# EAGLE board Accumulator Control Unit rev4 - blank (EAGLE 9.6.2)

Size 275.26 x 88.24 mm. Coordinates in mm from the lower left corner, seen from the top.
Outline: 48.72,73.39 241.02,73.39 247.82,66.59 272.92,66.59 275.02,64.49 275.02,5.39 arc-195 267.32,3.69 261.02,9.99 195.92,9.99 189.92,3.99 145.52,3.99 144.52,2.99 arc-150 136.72,2.99 135.72,3.99 34.02,3.99 33.02,2.99 arc-150 25.32,2.99 24.32,3.99 15.72,3.99 13.62,6.09 13.62,33.59 46.62,66.59 46.62,71.29 48.72,73.39
Copper layers (1*16): Top 0.035mm / dielectric 1.5mm / Bottom 0.035mm
Design rules "default": minimum track width 6mil, minimum drill 0.35mm, track to track 6mil, track to pad 6mil, pad to pad 6mil, via to via 6mil, smd to smd 6mil, copper to edge 40mil, drill to drill 6mil, minimum pad ring 10mil, minimum via ring 8mil, stop-mask expansion 4mil, vias tented up to drill 0mil, thermal gap 10mil

## Footprints (pad centres in the part's own frame; a part is rotated, then mirrored left to right if it is on the bottom)
0603-LED = smd 0.8 x 0.8: 1 -0.825,0; 2 0.825,0
OKI-78SR = drill 0.991: 1 -2.54,0; 2 0,0; 3 2.54,0
TEENSY_SHORT = drill 1.016: 3.3V 0,5.08; AGND/GND 0,2.54; D0 15.24,2.54; D1 15.24,5.08; D2 15.24,7.62; D3 15.24,10.16; D4 15.24,12.7; D5 15.24,15.24; D6 15.24,17.78; D7 15.24,20.32; D8 15.24,22.86; D9 15.24,25.4; D10 15.24,27.94; D11 15.24,30.48; D12 15.24,33.02; D13 0,33.02; D14 0,30.48; D15 0,27.94; D16 0,25.4; D17 0,22.86; D18 0,20.32; D19 0,17.78; D20 0,15.24; D21 0,12.7; D22 0,10.16; D23 0,7.62; GND 15.24,0; VIN 0,0
MICRO_MINIATURE = smd 3.429 x 1.778: 1 0,0
0603-CAP = smd 0.9 x 0.9: 1 -0.75,0; 2 0.75,0
0805-CAP = smd 0.95 x 1.4: 1 -0.925,0; 2 0.925,0
DO-214AA = smd 1.27 x 2.1: 1 -1.98,0; 2 1.98,0
SOT-23 = smd 0.711 x 0.889: 1 -0.94,-1.003; 2 0.94,-1.003; 3 0,1.003
0603-FUSE = smd 0.914 x 1.27: 1 -0.838,0; 2 0.838,0
MOLEX_MICROFIT_PTH_VERTICAL_02_SINGLE = drill 1.067: 1 1.499,0; 2 -1.499,0 | hole 1.321: 4.496,-1.956; -4.496,-1.956
MOLEX_MICROFIT_PTH_VERTICAL_08_DUAL = drill 1.067: 1 4.496,-2.997; 2 1.499,-2.997; 3 -1.499,-2.997; 4 -4.496,-2.997; 5 4.496,0; 6 1.499,0; 7 -1.499,0; 8 -4.496,0 | hole 1.067: 7.493,0.94; -7.493,0.94
MOLEX_MICROFIT_PTH_VERTICAL_12_DUAL = drill 1.067: 1 7.493,-2.997; 2 4.496,-2.997; 3 1.499,-2.997; 4 -1.499,-2.997; 5 -4.496,-2.997; 6 -7.493,-2.997; 7 7.493,0; 8 4.496,0; 9 1.499,0; 10 -1.499,0; 11 -4.496,0; 12 -7.493,0 | hole 1.067: 10.49,0.94; -10.49,0.94
1X02 = drill 1.016: 1 -1.27,0; 2 1.27,0
MOLEX_MICROFIT_PTH_VERTICAL_14_DUAL = drill 1.067: 1 8.992,-2.997; 2 5.994,-2.997; 3 2.997,-2.997; 4 0,-2.997; 5 -2.997,-2.997; 6 -5.994,-2.997; 7 -8.992,-2.997; 8 8.992,0; 9 5.994,0; 10 2.997,0; 11 0,0; 12 -2.997,0; 13 -5.994,0; 14 -8.992,0 | hole 1.067: 11.989,0.94; -11.989,0.94
MOLEX_MICROFIT_PTH_VERTICAL_04_DUAL = drill 1.067: 1 1.499,-2.997; 2 -1.499,-2.997; 3 1.499,0; 4 -1.499,0 | hole 1.067: 4.496,0.94; -4.496,0.94
MOLEX_NANOFIT_PTH_08 = drill 1.2: 1 3.75,0; 2 1.25,0; 3 -1.25,0; 4 -3.75,0; 5 3.75,-2.5; 6 1.25,-2.5; 7 -1.25,-2.5; 8 -3.75,-2.5 | hole 1.3: 0,1.34
SOP-04 = smd 0.7 x 1.3: 1 -1.27,-3.25; 2 1.27,-3.25; 3 1.27,3.25; 4 -1.27,3.25
0603-RES = smd 0.9 x 0.8: 1 -0.85,0; 2 0.85,0
HM2112ZNLT_AIRGAP = smd 1.02 x 1.89: 1 -4.78,-7.145; 2 -2.89,-7.145; 3 -1,-7.145; 4 1,-7.145; 5 2.875,-7.145; 6 4.78,-7.145; 7 4.78,7.145; 8 2.89,7.145; 9 1,7.145; 10 -1,7.145; 11 -2.89,7.145; 12 -4.78,7.145
5015 = smd 3.429 x 1.778: 1 0,0
DIP-4 = smd 1.5 x 1.9: 1 -1.27,-4.15; 2 1.27,-4.15; 3 -1.27,4.15; 4 1.27,4.15
SC-70-5 = smd 0.4 x 0.9: 1 -0.65,-1.1; 2 0,-1.1; 3 0.65,-1.1; 4 0.65,1.1; 5 -0.65,1.1
SOIC-08(NARROW,0.15") = smd 0.762 x 1.143: 1 -1.905,-2.603; 2 -0.635,-2.603; 3 0.635,-2.603; 4 1.905,-2.603; 5 1.905,2.603; 6 0.635,2.603; 7 -0.635,2.603; 8 -1.905,2.603
MSOP-16 = smd 0.305 x 0.889: 1 -1.75,-2.106; 2 -1.25,-2.106; 3 -0.75,-2.106; 4 -0.25,-2.106; 5 0.25,-2.106; 6 0.75,-2.106; 7 1.25,-2.106; 8 1.75,-2.106; 9 1.75,2.106; 10 1.25,2.106; 11 0.75,2.106; 12 0.25,2.106; 13 -0.25,2.106; 14 -0.75,2.106; 15 -1.25,2.106; 16 -1.75,2.106
SOT-23-5 = smd 0.62 x 1.22: 1 -0.95,-1.31; 2 0,-1.31; 3 0.95,-1.31; 4 0.95,1.31; 5 -0.95,1.31
SOT-223 = smd 1.2 x 1.6: 1 -2.3,-3.2; 2 0,-3.2; 3 2.3,-3.2 | smd 3.3 x 1.6: 4 0,3.2
MSOP-10 = smd 0.305 x 0.889: 1 -1,-2.106; 2 -0.5,-2.106; 3 0,-2.106; 4 0.5,-2.106; 5 1,-2.106; 6 1,2.106; 7 0.5,2.106; 8 0,2.106; 9 -0.5,2.106; 10 -1,2.106
MOUNTING_M3 = hole 3.4: 0,0
3568 = drill 1.6: 1 -4.953,1.702; 2 -4.953,-1.702; 3 4.953,-1.702; 4 4.953,1.702

## Placement (x,y rotation side)
3.3V  LED_0603_GREEN  [0603-LED]  not placed on the board
5V  LED_0603_BLUE  [0603-LED]  not placed on the board
12V  LED_0603_RED  [0603-LED]  not placed on the board
24V  LED_0603_ORANGE  [0603-LED]  not placed on the board
A1  VOLTAGE_REGULATOR_MODULE_OKI-78SR_5V  [OKI-78SR]  not placed on the board
A2  TEENSY_4.0  [TEENSY_SHORT]  19.81,76.13 0 top
A3  VOLTAGE_REGULATOR_MODULE_OKI-78SR_12V  [OKI-78SR]  not placed on the board
AMS_OK  LED_0603_GREEN  [0603-LED]  not placed on the board
BSPD_CURRENT  TEST_POINT  [MICRO_MINIATURE]  not placed on the board
C1  CAPACITOR_0603_10V_10NF  [0603-CAP]  not placed on the board
C2  CAPACITOR_0603_25V_0.1UF  [0603-CAP]  not placed on the board
C3  CAPACITOR_0603_10V_0.1UF  [0603-CAP]  not placed on the board
C4  CAPACITOR_0603_10V_680PF  [0603-CAP]  not placed on the board
C5  CAPACITOR_0603_10V_0.1UF  [0603-CAP]  not placed on the board
C6  CAPACITOR_0603_10V_10NF  [0603-CAP]  not placed on the board
C7  CAPACITOR_0805_50V_10UF  [0805-CAP]  not placed on the board
C8  CAPACITOR_0603_10V_0.1UF  [0603-CAP]  not placed on the board
C9  CAPACITOR_0603_10V_0.1UF  [0603-CAP]  not placed on the board
C10  CAPACITOR_0603_10V_0.1UF  [0603-CAP]  not placed on the board
C11  CAPACITOR_0603_10V_0.1UF  [0603-CAP]  not placed on the board
C12  CAPACITOR_0603_10V_680PF  [0603-CAP]  not placed on the board
C13  CAPACITOR_0603_10V_0.1UF  [0603-CAP]  not placed on the board
C14  CAPACITOR_0603_10V_0.1UF  [0603-CAP]  not placed on the board
C15  CAPACITOR_0603_10V_0.1UF  [0603-CAP]  not placed on the board
C16  CAPACITOR_0603_10V_0.1UF  [0603-CAP]  not placed on the board
C17  CAPACITOR_0603_10V_0.1UF  [0603-CAP]  not placed on the board
C18  CAPACITOR_0603_10V_0.1UF  [0603-CAP]  not placed on the board
C19  CAPACITOR_0603_10V_0.1UF  [0603-CAP]  not placed on the board
C20  CAPACITOR_0603_25V_0.1UF  [0603-CAP]  not placed on the board
C21  CAPACITOR_0603_10V_0.1UF  [0603-CAP]  not placed on the board
C22  CAPACITOR_0603_10V_0.1UF  [0603-CAP]  not placed on the board
C23  CAPACITOR_0603_10V_680PF  [0603-CAP]  not placed on the board
C24  CAPACITOR_0805_50V_10UF  [0805-CAP]  not placed on the board
C25  CAPACITOR_0603_10V_4.7NF  [0603-CAP]  not placed on the board
C26  CAPACITOR_0603_10V_0.1UF  [0603-CAP]  not placed on the board
C27  CAPACITOR_0603_10V_0.1UF  [0603-CAP]  not placed on the board
C28  CAPACITOR_0603_10V_0.1UF  [0603-CAP]  not placed on the board
C29  CAPACITOR_0603_10V_0.1UF  [0603-CAP]  not placed on the board
C30  CAPACITOR_0603_10V_0.1UF  [0603-CAP]  not placed on the board
C31  CAPACITOR_0603_10V_0.1UF  [0603-CAP]  not placed on the board
C32  CAPACITOR_0603_10V_680PF  [0603-CAP]  not placed on the board
C33  CAPACITOR_0603_25V_10UF  [0603-CAP]  not placed on the board
C34  CAPACITOR_0603_10V_0.1UF  [0603-CAP]  not placed on the board
C35  CAPACITOR_0603_50V_0.1UF  [0603-CAP]  not placed on the board
C36  CAPACITOR_0603_10V_4.7UF  [0603-CAP]  not placed on the board
C37  CAPACITOR_0603_10V_1UF  [0603-CAP]  not placed on the board
C38  CAPACITOR_0603_10V_0.1UF  [0603-CAP]  not placed on the board
C39  CAPACITOR_0603_10V_1UF  [0603-CAP]  not placed on the board
C40  CAPACITOR_0805_50V_10UF  [0805-CAP]  not placed on the board
C41  CAPACITOR_0603_50V_0.1UF  [0603-CAP]  not placed on the board
C42  CAPACITOR_0603_10V_0.1UF  [0603-CAP]  not placed on the board
C43  CAPACITOR_0603_10V_0.1UF  [0603-CAP]  not placed on the board
C44  CAPACITOR_0603_10V_1UF  [0603-CAP]  not placed on the board
C45  CAPACITOR_0603_10V_4.7NF  [0603-CAP]  not placed on the board
C46  CAPACITOR_0603_10V_0.1UF  [0603-CAP]  not placed on the board
C100  CAPACITOR_0603_10V_10NF  [0603-CAP]  not placed on the board
C101  CAPACITOR_0603_25V_1UF  [0603-CAP]  not placed on the board
C102  CAPACITOR_0603_25V_0.1UF  [0603-CAP]  not placed on the board
C103  CAPACITOR_0603_10V_4.7UF  [0603-CAP]  not placed on the board
C104  CAPACITOR_0603_25V_1UF  [0603-CAP]  not placed on the board
CURRENT_REF  TEST_POINT  [MICRO_MINIATURE]  not placed on the board
CURRENT_SENSE  TEST_POINT  [MICRO_MINIATURE]  not placed on the board
D1  TVS_30VDO-214AA  [DO-214AA]  not placed on the board
D2  TVS_8V  [SOT-23]  not placed on the board
D3  TVS_30VDO-214AA  [DO-214AA]  not placed on the board
D4  TVS_8V  [SOT-23]  not placed on the board
D5  TVS_30VDO-214AA  [DO-214AA]  not placed on the board
D6  TVS_30VDO-214AA  [DO-214AA]  not placed on the board
D7  TVS_30VDO-214AA  [DO-214AA]  not placed on the board
D11  TVS_15V  [SOT-23]  not placed on the board
D100  TVS_15V  [SOT-23]  not placed on the board
D101  TVS_15V  [SOT-23]  not placed on the board
F1  FUSE_0603_.75A  [0603-FUSE]  not placed on the board
F2  FUSE_0603_.75A  [0603-FUSE]  not placed on the board
IMD_OK  LED_0603_ORANGE  [0603-LED]  not placed on the board
J1  CONNECTOR-2_MF_T_V_  [MOLEX_MICROFIT_PTH_VERTICAL_02_SINGLE]  not placed on the board
J2  CONNECTOR-8_MF_T_V_  [MOLEX_MICROFIT_PTH_VERTICAL_08_DUAL]  not placed on the board
J3  CONNECTOR-12_MF_T_V_  [MOLEX_MICROFIT_PTH_VERTICAL_12_DUAL]  not placed on the board
J4  JUMPER__1X02  [1X02]  not placed on the board
J5  CONNECTOR-14_MF_T_V_  [MOLEX_MICROFIT_PTH_VERTICAL_14_DUAL]  -14.48,82.48 0 top
J6  CONNECTOR-4_μF_T_V_BLACK  [MOLEX_MICROFIT_PTH_VERTICAL_04_DUAL]  not placed on the board
J8  JUMPER__1X02  [1X02]  not placed on the board
J100  CONNECTOR-8_NF_T_V_NATURAL  [MOLEX_NANOFIT_PTH_08]  not placed on the board
K1  RELAY_SOLIDSTATE_NO_CPC1020NTR  [SOP-04]  not placed on the board
OKHS  LED_0603_YELLOW  [0603-LED]  not placed on the board
PACK+_OUT_TEST  TEST_POINT  [MICRO_MINIATURE]  not placed on the board
PRECHARGE_OK  LED_0603_RED  [0603-LED]  not placed on the board
PRECHARGE_OK_TEST  TEST_POINT  [MICRO_MINIATURE]  not placed on the board
Q1  TRANSISTOR_N_MOS__PMV15ENEA  [SOT-23]  not placed on the board
Q2  TRANSISTOR_N_MOS__PMV15ENEA  [SOT-23]  not placed on the board
Q100  TRANSISTOR_N_MOS__PMV15ENEA  [SOT-23]  not placed on the board
Q101  TRANSISTOR_N_MOS__PMV15ENEA  [SOT-23]  not placed on the board
R1  RESISTOR_0603_120  [0603-RES]  not placed on the board
R2  RESISTOR_0603_2K  [0603-RES]  not placed on the board
R3  RESISTOR_0603_2K  [0603-RES]  not placed on the board
R4  RESISTOR_0603_5.1K  [0603-RES]  not placed on the board
R5  RESISTOR_0603_33K  [0603-RES]  not placed on the board
R6  RESISTOR_0603_20K  [0603-RES]  not placed on the board
R7  RESISTOR_0603_5.1K  [0603-RES]  not placed on the board
R8  RESISTOR_0603_5.1K  [0603-RES]  not placed on the board
R9  RESISTOR_0603_2K  [0603-RES]  not placed on the board
R10  RESISTOR_0603_1K  [0603-RES]  not placed on the board
R11  RESISTOR_0603_1K  [0603-RES]  not placed on the board
R12  RESISTOR_0603_20K  [0603-RES]  not placed on the board
R13  RESISTOR_0603_10  [0603-RES]  not placed on the board
R14  RESISTOR_0603_10K  [0603-RES]  not placed on the board
R15  RESISTOR_0603_2.2K  [0603-RES]  not placed on the board
R16  RESISTOR_0603_1K  [0603-RES]  not placed on the board
R17  RESISTOR_0603_10K  [0603-RES]  not placed on the board
R18  RESISTOR_0603_10  [0603-RES]  not placed on the board
R19  RESISTOR_0603_1K  [0603-RES]  not placed on the board
R20  RESISTOR_0603_  [0603-RES]  not placed on the board
R21  RESISTOR_0603_5.1K  [0603-RES]  not placed on the board
R22  RESISTOR_0603_10K  [0603-RES]  not placed on the board
R23  RESISTOR_0603_12K  [0603-RES]  not placed on the board
R24  RESISTOR_0603_1K  [0603-RES]  not placed on the board
R25  RESISTOR_0603_1K  [0603-RES]  not placed on the board
R26  RESISTOR_0603_10K  [0603-RES]  not placed on the board
R27  RESISTOR_0603_10K  [0603-RES]  not placed on the board
R28  RESISTOR_0603_470  [0603-RES]  not placed on the board
R29  RESISTOR_0603_10K  [0603-RES]  not placed on the board
R30  RESISTOR_0603_10K  [0603-RES]  not placed on the board
R31  RESISTOR_0603_12K  [0603-RES]  not placed on the board
R32  RESISTOR_0603_2K  [0603-RES]  not placed on the board
R33  RESISTOR_0603_2K  [0603-RES]  not placed on the board
R34  RESISTOR_0603_470  [0603-RES]  not placed on the board
R35  RESISTOR_0603_470  [0603-RES]  not placed on the board
R36  RESISTOR_0603_60.4  [0603-RES]  not placed on the board
R37  RESISTOR_0603_10K  [0603-RES]  not placed on the board
R38  RESISTOR_0603_8.66K  [0603-RES]  not placed on the board
R39  RESISTOR_0603_73.2K  [0603-RES]  not placed on the board
R40  RESISTOR_0603_1M  [0603-RES]  not placed on the board
R41  RESISTOR_0603_14K  [0603-RES]  not placed on the board
R42  RESISTOR_0603_10K  [0603-RES]  not placed on the board
R43  RESISTOR_0603_10K  [0603-RES]  not placed on the board
R44  RESISTOR_0603_10K  [0603-RES]  not placed on the board
R45  RESISTOR_0603_DNP  [0603-RES]  not placed on the board
R46  RESISTOR_0603_330K  [0603-RES]  not placed on the board
R47  RESISTOR_0603_DNP  [0603-RES]  not placed on the board
R48  RESISTOR_0603_14K  [0603-RES]  not placed on the board
R49  RESISTOR_0603_1K  [0603-RES]  not placed on the board
R50  RESISTOR_0603_10K  [0603-RES]  not placed on the board
R51  RESISTOR_0603_5.9K  [0603-RES]  not placed on the board
R52  RESISTOR_0603_10K  [0603-RES]  not placed on the board
R53  RESISTOR_0603_11.5K  [0603-RES]  not placed on the board
R54  RESISTOR_0603_DNP  [0603-RES]  not placed on the board
R55  RESISTOR_0603_10K  [0603-RES]  not placed on the board
R56  RESISTOR_0603_12K  [0603-RES]  not placed on the board
R57  RESISTOR_0603_2.74K  [0603-RES]  not placed on the board
R58  RESISTOR_0603_10.5K  [0603-RES]  not placed on the board
R59  RESISTOR_0603_100K  [0603-RES]  not placed on the board
R60  RESISTOR_0603_60.4  [0603-RES]  not placed on the board
R61  RESISTOR_0603_2K  [0603-RES]  not placed on the board
R62  RESISTOR_0603_2K  [0603-RES]  not placed on the board
R63  RESISTOR_0603_1K  [0603-RES]  not placed on the board
R64  RESISTOR_0603_DNP  [0603-RES]  not placed on the board
R65  RESISTOR_0603_13K  [0603-RES]  not placed on the board
R66  RESISTOR_0603_13K  [0603-RES]  not placed on the board
R67  RESISTOR_0603_10.5K  [0603-RES]  not placed on the board
R68  RESISTOR_0603_10.5K  [0603-RES]  not placed on the board
R69  RESISTOR_0603_10K  [0603-RES]  not placed on the board
R70  RESISTOR_0603_36.5K  [0603-RES]  not placed on the board
R71  RESISTOR_0603_10K  [0603-RES]  not placed on the board
R72  RESISTOR_0603_13K  [0603-RES]  not placed on the board
R73  RESISTOR_0603_10K  [0603-RES]  not placed on the board
R74  RESISTOR_0603_13K  [0603-RES]  not placed on the board
R75  RESISTOR_0603_10.5K  [0603-RES]  not placed on the board
R76  RESISTOR_0603_10.5K  [0603-RES]  not placed on the board
R77  RESISTOR_0603_10K  [0603-RES]  not placed on the board
R78  RESISTOR_0603_12K  [0603-RES]  not placed on the board
R79  RESISTOR_0603_33K  [0603-RES]  not placed on the board
R80  RESISTOR_0603_5.1K  [0603-RES]  not placed on the board
R81  RESISTOR_0603_10K  [0603-RES]  not placed on the board
R82  RESISTOR_0603_10K  [0603-RES]  not placed on the board
R83  RESISTOR_0603_3.3K  [0603-RES]  not placed on the board
R84  RESISTOR_0603_5.1K  [0603-RES]  not placed on the board
R85  RESISTOR_0603_33K  [0603-RES]  not placed on the board
R86  RESISTOR_0603_100K  [0603-RES]  not placed on the board
R87  RESISTOR_0603_2.74K  [0603-RES]  not placed on the board
R88  RESISTOR_0603_10.5K  [0603-RES]  not placed on the board
R89  RESISTOR_0603_60.4  [0603-RES]  not placed on the board
R90  RESISTOR_0603_2.2K  [0603-RES]  not placed on the board
R91  RESISTOR_0603_60.4  [0603-RES]  not placed on the board
R92  RESISTOR_0603_10K  [0603-RES]  not placed on the board
R100  RESISTOR_0603_10K  [0603-RES]  not placed on the board
R101  RESISTOR_0603_10K  [0603-RES]  not placed on the board
R102  RESISTOR_0603_10K  [0603-RES]  not placed on the board
R103  RESISTOR_0603_10  [0603-RES]  not placed on the board
R104  RESISTOR_0603_10  [0603-RES]  not placed on the board
R105  RESISTOR_0603_43K  [0603-RES]  not placed on the board
R106  RESISTOR_0603_10K  [0603-RES]  not placed on the board
R109  RESISTOR_0603_18.7K  [0603-RES]  not placed on the board
R110  RESISTOR_0603_  [0603-RES]  not placed on the board
T1  TRANSFORMER_HM2112ZNLT_AIRGAP  [HM2112ZNLT_AIRGAP]  8.38,82.48 0 top
TD+  TEST_POINT  [MICRO_MINIATURE]  not placed on the board
TD-  TEST_POINT  [MICRO_MINIATURE]  not placed on the board
TEENSY_OK  LED_0603_RED  [0603-LED]  not placed on the board
TP1_24V  TEST_POINT  [5015]  not placed on the board
TP_3.3V  TEST_POINT  [5015]  not placed on the board
TP_5V  TEST_POINT  [5015]  not placed on the board
TP_12V  TEST_POINT  [5015]  not placed on the board
TP_AMS_OK  TEST_POINT  [MICRO_MINIATURE]  not placed on the board
TP_GND  TEST_POINT  [5015]  not placed on the board
TP_IMD_OK  TEST_POINT  [MICRO_MINIATURE]  not placed on the board
TP_TSAL_GREEN  TEST_POINT  [MICRO_MINIATURE]  not placed on the board
TP_TSAL_RED  TEST_POINT  [MICRO_MINIATURE]  not placed on the board
TS+_OUT_TEST  TEST_POINT  [MICRO_MINIATURE]  not placed on the board
TSAL_GREEN  LED_0603_GREEN  [0603-LED]  not placed on the board
TSAL_RED  LED_0603_RED  [0603-LED]  not placed on the board
U1  RELAY_SOLIDSTATE_NO_DIP-4  [DIP-4]  not placed on the board
U2  RELAY_SOLIDSTATE_NO_DIP-4  [DIP-4]  not placed on the board
U3  OPAMP_1_CHANNEL_OPA991  [SC-70-5]  not placed on the board
U4  MAX7404  [SOIC-08(NARROW,0.15")]  not placed on the board
U5  LTC6820  [MSOP-16]  not placed on the board
U6  LOGICGATE_BUFFER  [SC-70-5]  not placed on the board
U7  ADM8316WBX30  [SOT-23-5]  not placed on the board
U8  RELAY_SOLIDSTATE_NO_DIP-4  [DIP-4]  not placed on the board
U9  OPAMP_1_CHANNEL_OPA991  [SC-70-5]  not placed on the board
U10  MAX7404  [SOIC-08(NARROW,0.15")]  not placed on the board
U11  OPAMP_1_CHANNEL_OPA991  [SC-70-5]  not placed on the board
U12  LOGICGATE_AND_DCK3  [SC-70-5]  not placed on the board
U13  OPAMP_1_CHANNEL_OPA991  [SC-70-5]  not placed on the board
U14  LOGICGATE_AND_DCK3  [SC-70-5]  not placed on the board
U15  OPAMP_1_CHANNEL_OPA991  [SC-70-5]  not placed on the board
U16  LOGICGATE_AND_DCK3  [SC-70-5]  not placed on the board
U17  OPAMP_1_CHANNEL_OPA991  [SC-70-5]  not placed on the board
U18  OPAMP_1_CHANNEL_OPA991  [SC-70-5]  not placed on the board
U19  MAX7404  [SOIC-08(NARROW,0.15")]  not placed on the board
U20  OPAMP_1_CHANNEL_OPA991  [SC-70-5]  not placed on the board
U21  OPAMP_1_CHANNEL_OPA991  [SC-70-5]  not placed on the board
U22  OPAMP_1_CHANNEL_OPA991  [SC-70-5]  not placed on the board
U23  OPAMP_1_CHANNEL_OPA991  [SC-70-5]  not placed on the board
U24  OPAMP_1_CHANNEL_OPA991  [SC-70-5]  not placed on the board
U25  MAX7404  [SOIC-08(NARROW,0.15")]  not placed on the board
U26  VOLTAGE_REGULATOR_SOT-223_3.3V  [SOT-223]  not placed on the board
U27  TCAN1051HQV-Q1  [SOIC-08(NARROW,0.15")]  not placed on the board
U28  OPAMP_1_CHANNEL_OPA991  [SC-70-5]  not placed on the board
U29  TCAN1051HQV-Q1  [SOIC-08(NARROW,0.15")]  not placed on the board
U100  ADG1423  [MSOP-10]  not placed on the board
U101  LM555  [SOIC-08(NARROW,0.15")]  not placed on the board
U$1  [MOUNTING_M3]  54.62,69.39 0 top
U$2  [MOUNTING_M3]  71.32,57.59 0 top
U$3  [MOUNTING_M3]  29.12,3.99 0 top
U$4  [MOUNTING_M3]  140.62,3.99 0 top
U$5  [MOUNTING_M3]  201.32,57.59 0 top
U$6  [MOUNTING_M3]  236.52,69.39 0 top
U$7  [MOUNTING_M3]  271.02,62.59 0 top
U$8  [MOUNTING_M3]  271.32,3.99 0 top
WATCHDOG  LED_0603_BLUE  [0603-LED]  not placed on the board
WATCHDOG_INPUT  TEST_POINT  [MICRO_MINIATURE]  not placed on the board
XF1  FUSE_HOLDER_MINIBLADEPTH  [3568]  not placed on the board

## Library data of the parts
3.3V AMS_OK = HyTechDevices - Copy; COLOR: Green; DKPN: 754-1790-1-ND; MANUFACTURER: Kingbright; MOPN: 604-APT1608ZGCK; MPN: APT1608ZGCK
5V = HyTechDevices - Copy; COLOR: Blue; DKPN: 754-1789-1-ND; MANUFACTURER: Kingbright; MOPN: 604-APT1608VBC/D; MPN: APT1608VBC/D
12V = HyTechDevices - Copy; COLOR: Red; DKPN: 754-1786-1-ND; MANUFACTURER: Kingbright; MOPN: 604-APT1608SECKJ3PRV; MPN: APT1608SECK/J3-PRV
24V = HyTechDevices; COLOR: Orange; DKPN: 754-1120-1-ND; MANUFACTURER: Kingbright; MOPN: 604-APT1608SECK; MPN: APT1608SECK
A1 = HyTechDevices; DKPN: 811-2196-5-ND; MANUFACTURER: Murata Power Solutions Inc.; MOPN: 580-OKI78SR5/1.5W36C; MPN: OKI-78SR-5/1.5-W36-C
A2 = HyTechDevices; TEENSY: 4.0
A3 = HyTechDevices; DKPN: 811-3293-ND; MANUFACTURER: Murata Power Solutions Inc.; MOPN: 580-OKI78SR12/1W36C; MPN: OKI-78SR-12/1.0-W36-C
BSPD_CURRENT CURRENT_REF CURRENT_SENSE PACK+_OUT_TEST PRECHARGE_OK_TEST TD+ TD- TP_AMS_OK TP_IMD_OK TS+_OUT_TEST WATCHDOG_INPUT = HyTechDevices - Copy; DKPN: 36-5015CT-ND; MANUFACTURER: Keystone Electronics; MOPN: 534-5015; MPN: 5015
C1 C100 = HyTechDevices - Copy; CAPACITANCE: 10nF; DKPN: 311-4054-1-ND; MANUFACTURER: Yageo; MOPN: 603-CC603KRX7R6BB103; MPN: CC0603KRX7R6BB103; TOLERANCE: 10%; VOLTAGE: 10V
C2 C20 = HyTechDevices; CAPACITANCE: 0.1µF; DKPN: 1276-1006-1-ND; MANUFACTURER: Samsung Electro-Mechanics; MOPN: 187-CL10B104KA8NNNC; MPN: CL10B104KA8NNNC; TOLERANCE: 10%; VOLTAGE: 25V
C3 C8-C11 C21 C22 C29-C31 = HyTechDevices - Copy; CAPACITANCE: 0.1µF; DKPN: 720-1688-1-ND; MANUFACTURER: Vishay Vitramon; MOPN: 77-VJ0603Y104JXQPBC; MPN: VJ0603Y104JXQPW1BC; TOLERANCE: 5%; VOLTAGE: 10V
C4 C12 C23 C32 = HyTechDevices - Copy; CAPACITANCE: 680pF; DKPN: 732-7757-1-ND; MANUFACTURER: Würth Elektronik; MOPN: 710-885012006013; MPN: 885012006013; TOLERANCE: 5%; VOLTAGE: 10V
C5 C13-C19 C26-C28 C34 C38 C42 C43 C46 = HyTechDevices; CAPACITANCE: 0.1µF; DKPN: 720-1688-1-ND; MANUFACTURER: Vishay Vitramon; MOPN: 77-VJ0603Y104JXQPBC; MPN: VJ0603Y104JXQPW1BC; TOLERANCE: 5%; VOLTAGE: 10V
C6 = HyTechDevices; CAPACITANCE: 10nF; DKPN: 311-4054-1-ND; MANUFACTURER: Yageo; MOPN: 603-CC603KRX7R6BB103; MPN: CC0603KRX7R6BB103; TOLERANCE: 10%; VOLTAGE: 10V
C7 C24 C40 = HyTechDevices; CAPACITANCE: 10uF; DKPN: 490-18663-2-ND; MANUFACTURER: Murata; MOPN: 81-GRM21BR61H106KE3L; MPN: GRM21BR61H106KE43L; TOLERANCE: 10%; VOLTAGE: 50V
C25 C45 = HyTechDevices; CAPACITANCE: 4.7nF; DKPN: 732-7931-1-ND; MANUFACTURER: Würth Elektronik; MOPN: 710-885012206012; MPN: 885012206012; TOLERANCE: 10%; VOLTAGE: 10V
C33 = HyTechDevices; CAPACITANCE: 10µF; DKPN: 490-7202-1-ND; MANUFACTURER: Murata Electronics; MOPN: 81-GRM188R61E106MA3D; MPN: GRM188R61E106MA73D; TOLERANCE: 20%; VOLTAGE: 25V
C35 C41 = HyTechDevices; CAPACITANCE: 0.1µF; DKPN: 311-1344-1-ND; MANUFACTURER: Yageo; MOPN: 603-CC603KRX7R9BB104; MPN: CC0603KRX7R9BB104; TOLERANCE: 10%; VOLTAGE: 50V
C36 C103 = HyTechDevices - Copy; CAPACITANCE: 4.7µF; DKPN: 1276-1044-1-ND; MANUFACTURER: Samsung Electro-Mechanics; MOPN: 187-CL10A475KP8NNNC; MPN: CL10A475KP8NNNC; TOLERANCE: 10%; VOLTAGE: 10V
C37 = HyTechDevices - Copy; CAPACITANCE: 1µF; DKPN: 311-1796-1-ND; MANUFACTURER: Yageo; MOPN: 603-CC603KRX7R6BB105; MPN: CC0603KRX7R6BB105; TOLERANCE: 10%; VOLTAGE: 10V
C39 C44 = HyTechDevices; CAPACITANCE: 1µF; DKPN: 311-1796-1-ND; MANUFACTURER: Yageo; MOPN: 603-CC603KRX7R6BB105; MPN: CC0603KRX7R6BB105; TOLERANCE: 10%; VOLTAGE: 10V
C101 = HyTechDevices - Copy; CAPACITANCE: 1µF; DKPN: 1276-1184-1-ND; MANUFACTURER: Samsung Electro-Mechanics; MOPN: 187-CL10B105KA8NNNC; MPN: CL10B105KA8NNNC; TOLERANCE: 10%; VOLTAGE: 25V
C102 = HyTechDevices - Copy; CAPACITANCE: 0.1µF; DKPN: 1276-1006-1-ND; MANUFACTURER: Samsung Electro-Mechanics; MOPN: 187-CL10B104KA8NNNC; MPN: CL10B104KA8NNNC; TOLERANCE: 10%; VOLTAGE: 25V
C104 = HyTechDevices; CAPACITANCE: 1µF; DKPN: 1276-1184-1-ND; MANUFACTURER: Samsung Electro-Mechanics; MOPN: 187-CL10B105KA8NNNC; MPN: CL10B105KA8NNNC; TOLERANCE: 10%; VOLTAGE: 25V
D1 D3 D5-D7 = HyTechDevices; DKPN: 118-1.5SMBJ30ATR-ND; MANUFACTURER: Bourns Inc.; MOPN: 652-1.5SMBJ30A; MPN: 1.5SMBJ30A; VOLTAGE: 30V
D2 D4 = HyTechDevices - Copy; DKPN: GSOT08-E3-08-ND; MANUFACTURER: Vishay General Semiconductor - Diodes Division; MOPN: 78-GSOT08-E3-08; MPN: GSOT08-E3-08; VOLTAGE: 8V
D11 D100 D101 = HyTechDevices; DKPN: GSOT15-E3-08CT-ND; MANUFACTURER: Vishay General Semiconductor - Diodes Division; MOPN: 78-GSOT15-E3-08; MPN: GSOT15-E3-08; VOLTAGE: 15V
F1 F2 = HyTechDevices; CURRENT: 0.75A; DKPN: 507-2159-2-ND; I2T: 0.0013; MANUFACTURER: Bel Fuse; MOPN: 530-0686F0750-01; MPN: 0686F0750-01; VOLTAGE: 63V
IMD_OK = HyTechDevices - Copy; COLOR: Orange; DKPN: 754-1120-1-ND; MANUFACTURER: Kingbright; MOPN: 604-APT1608SECK; MPN: APT1608SECK
J1 = HyTechDevices - Copy; MANUFACTURER: MOLEX; MPN: 436500217
J2 = HyTechDevices - Copy; MANUFACTURER: MOLEX; MPN: 430450814
J3 = HyTechDevices; DKPN: WM1800-ND; MANUFACTURER: MOLEX; MOPN: 538-43045-1214; MPN: 430451214
J4 J8 = HyTechDevices; DKPN: S1011EC-02-ND; MANUFACTURER: Sullins Connector Solutions; MPN: PRPC002SAAN-RC
J5 = HyTechDevices; DKPN: WM4717-ND; MANUFACTURER: MOLEX; MOPN: 538-43045-1414; MPN: 430451414
J6 = HyTechDevices; DKPN: 2266-43045-0414-ND; MANUFACTURER: Molex; MOPN: 538-43045-0414; MPN: 430450414
J100 = HyTechDevices; DKPN: WM15077-ND; MANUFACTURER: Molex; MOPN: 538-105310-2308; MPN: 105310-2308
K1 = HyTechDevices; DKPN: CLA318CT-ND; MANUFACTURER: IXYS Integrated Circuits Division; MOPN: 849-CPC1020NTR; MPN: CPC1020NTR; VOLTAGE: 30V
OKHS = HyTechDevices - Copy; COLOR: Yellow; DKPN: 754-1788-1-ND; MANUFACTURER: Kingbright; MOPN: 604-APT1608SYCK/J3-PRV; MPN: APT1608SYCK/J3-PRV
PRECHARGE_OK TEENSY_OK TSAL_RED = HyTechDevices; COLOR: Red; DKPN: 754-1786-1-ND; MANUFACTURER: Kingbright; MOPN: 604-APT1608SECKJ3PRV; MPN: APT1608SECK/J3-PRV
Q1 Q2 Q100 Q101 = HyTechDevices; DKPN: 1727-8588-1-ND; MANUFACTURER: Nexperia USA Inc.; MOPN: 771-PMV15ENEAR; MPN: PMV15ENEAR
R1 = HyTechDevices; DKPN: P120DBCT-ND; MANUFACTURER: Panasonic Electronic Components; MOPN: 667-ERA-3AEB121V; MPN: ERA-3AEB121V; POWER: 0.1W; RESISTANCE: 120; TOLERANCE: 0.1%; VOLTAGE_CONTINUOUS: 3.46V; VOLTAGE_MAX: 75V
R2 R3 R9 R32 R33 R61 R62 = HyTechDevices; DKPN: 10-ERJ-UP3F2001VTR-ND; MANUFACTURER: Panasonic Electronic Components; MOPN: 667-ERJ-UP3F2001V; MPN: ERJ-UP3F2001V; POWER: 0.25W; RESISTANCE: 2k; TOLERANCE: 1%; VOLTAGE_CONTINUOUS: 22.36V; VOLTAGE_MAX: 150V
R4 R7 R8 R21 R80 R84 = HyTechDevices; DKPN: 311-5.10KHRTR-ND; MANUFACTURER: Yageo; MOPN: 603-RC0603FR-075K1L; MPN: RC0603FR-075K1L; POWER: 0.1W; RESISTANCE: 5.1k; TOLERANCE: 1%; VOLTAGE_CONTINUOUS: 22.58V; VOLTAGE_MAX: 75V
R5 R79 R85 = HyTechDevices; DKPN: RHM33KAYTR-ND; MANUFACTURER: Rohm Semiconductor; MOPN: 755-KTR03EZPF3302; MPN: KTR03EZPF3302; POWER: 0.1W; RESISTANCE: 33k; TOLERANCE: 1%; VOLTAGE_CONTINUOUS: 57.44V; VOLTAGE_MAX: 350V
R6 R12 = HyTechDevices; DKPN: 311-20.0KHRTR-ND; MANUFACTURER: Yageo; MOPN: 603-RC0603FR-0720KL; MPN: RC0603FR-0720KL; POWER: 0.1 W; RESISTANCE: 20k; TOLERANCE: 1%; VOLTAGE_CONTINUOUS: 44.72V; VOLTAGE_MAX: 75V
R10 R11 R16 R19 R49 R63 = HyTechDevices; DKPN: 1712-CPF-A-0603B1K0ETR-ND; MANUFACTURER: TE Connectivity Passive Product; MOPN: 279-CPF-A-0603B1K0E; MPN: CPF-A-0603B1K0E; POWER: 0.0625W; RESISTANCE: 1k; TOLERANCE: 0.1%; VOLTAGE_CONTINUOUS: 7.9V; VOLTAGE_MAX: 50V
R13 R18 R103 R104 = HyTechDevices; DKPN: 311-10.0HRCT-ND; MANUFACTURER: Yageo; MOPN: 603-RC0603FR-0710RL; MPN: RC0603FR-0710RL; POWER: 0.1W; RESISTANCE: 10; TOLERANCE: 1%; VOLTAGE_CONTINUOUS: 1.00V; VOLTAGE_MAX: 75V
R14 R17 R26 R27 R82 R92 R101 R102 R106 = HyTechDevices; DKPN: 311-10.0KHRCT-ND; MANUFACTURER: Yageo; MOPN: 603-RC0603FR-0710KL; MPN: RC0603FR-0710KL; POWER: 0.1W; RESISTANCE: 10k; TOLERANCE: 1%; VOLTAGE_CONTINUOUS: 31.62V; VOLTAGE_MAX: 75V
R15 R90 = HyTechDevices - Copy; DKPN: 13-RC0603DR-072K2LCT-ND; MANUFACTURER: Yageo; MOPN: 603-RC0603DR-072K2L; MPN: RC0603DR-072K2L; POWER: 0.1W; RESISTANCE: 2.2k; TOLERANCE: 0.5%; VOLTAGE_CONTINUOUS: 75V; VOLTAGE_MAX: 75V
R20 R110 = HyTechDevices; DKPN: P30KBDCT-ND; MANUFACTURER: Panasonic Electronic Components; MOPN: 667-ERA-3ARB303V; MPN: ERA-3ARB303V; POWER: 0.1W; RESISTANCE: 30k; TOLERANCE: 0.1%; VOLTAGE_CONTINUOUS: 54.77V; VOLTAGE_MAX: 75V
R22 R29 R30 R37 R42-R44 R50 R52 R55 R69 R71 R73 R77 R81 R100 = HyTechDevices - Copy; DKPN: 311-10.0KHRCT-ND; MANUFACTURER: Yageo; MOPN: 603-RC0603FR-0710KL; MPN: RC0603FR-0710KL; POWER: 0.1W; RESISTANCE: 10k; TOLERANCE: 1%; VOLTAGE_CONTINUOUS: 31.62V; VOLTAGE_MAX: 75V
R23 R31 R56 R78 = HyTechDevices - Copy; DKPN: 311-12.0KHRCT-ND; MANUFACTURER: Yageo; MOPN: 603-RC0603FR-0712KL; MPN: RC0603FR-0712KL; POWER: 0.1W; RESISTANCE: 12k; TOLERANCE: 1%; VOLTAGE_CONTINUOUS: 34.64V; VOLTAGE_MAX: 75V
R24 R25 = HyTechDevices - Copy; DKPN: 311-1.00KHRCT-ND; MANUFACTURER: Yageo; MOPN: 603-RC0603FR-071KL; MPN: RC0603FR-071KL; POWER: 0.1W; RESISTANCE: 1k; TOLERANCE: 1%; VOLTAGE_CONTINUOUS: 10.00V; VOLTAGE_MAX: 75V
R28 = HyTechDevices; DKPN: P470BYCT-ND; MANUFACTURER: Panasonic Electronic Components; MOPN: 667-ERJ-PA3F4700V; MPN: ERJ-PA3F4700V; POWER: 0.25W; RESISTANCE: 470; TOLERANCE: 1%; VOLTAGE_CONTINUOUS: 10.84V; VOLTAGE_MAX: 150V
R34 R35 = HyTechDevices - Copy; DKPN: P470BYCT-ND; MANUFACTURER: Panasonic Electronic Components; MOPN: 667-ERJ-PA3F4700V; MPN: ERJ-PA3F4700V; POWER: 0.25W; RESISTANCE: 470; TOLERANCE: 1%; VOLTAGE_CONTINUOUS: 10.84V; VOLTAGE_MAX: 150V
R36 R60 R89 R91 = HyTechDevices; DKPN: 311-60.4HRCT-ND; MANUFACTURER: Yageo; MOPN: 603-RC0603FR-0760R4L; MPN: RC0603FR-0760R4L; POWER: 0.1W; RESISTANCE: 60.4; TOLERANCE: 1%; VOLTAGE_CONTINUOUS: 2.48V; VOLTAGE_MAX: 75V
R38 = HyTechDevices; DKPN: YAG4603TR-ND; MANUFACTURER: Yageo; MOPN: 603-RT0603BRD078K66L; MPN: RT0603BRD078K66L; POWER: 0.1W; RESISTANCE: 8.66k; TOLERANCE: 0.1%; VOLTAGE_CONTINUOUS: 29.43V; VOLTAGE_MAX: 75V
R39 = HyTechDevices; DKPN: P73.2KDBCT-ND; MANUFACTURER: Panasonic Electronic Components; MOPN: 667-ERA-3AEB7322V; MPN: ERA-3AEB7322V; POWER: 0.1W; RESISTANCE: 73.2k; TOLERANCE: 0.1%; VOLTAGE_CONTINUOUS: 75V; VOLTAGE_MAX: 75V
R40 = HyTechDevices; DKPN: 311-1.00MHRCT-ND; MANUFACTURER: Yageo; MOPN: 603-RC0603FR-071ML; MPN: RC0603FR-071ML; POWER: 0.1W; RESISTANCE: 1M; TOLERANCE: 1%; VOLTAGE_CONTINUOUS: 75V; VOLTAGE_MAX: 75V
R41 R48 = HyTechDevices; DKPN: RT0603BRB0714KL-ND; MANUFACTURER: YAGEO; MOPN: 603-RT0603BRB0714KL; MPN: RT0603BRB0714KL; POWER: 0.1W; RESISTANCE: 14k; TOLERANCE: 0.1%; VOLTAGE_CONTINUOUS: 37.4V; VOLTAGE_MAX: 75V
R45 R47 R54 R64 = HyTechDevices; RESISTANCE: DNP
R46 = HyTechDevices; DKPN: P330KDBCT-ND; MANUFACTURER: Panasonic Electronic Components; MOPN: 667-ERA-3AEB334V; MPN: ERA-3AEB334V; POWER: 0.1W; RESISTANCE: 330k; TOLERANCE: 0.1%; VOLTAGE_CONTINUOUS: 75V; VOLTAGE_MAX: 75V
R51 = HyTechDevices; DKPN: P5.9KDBCT-ND; MANUFACTURER: Panasonic Electronic Components; MOPN: 667-ERA-3AEB5901V; MPN: ERA-3AEB5901V; POWER: 0.1W; RESISTANCE: 5.9k; TOLERANCE: 0.1%; VOLTAGE_CONTINUOUS: 24.29V; VOLTAGE_MAX: 75V
R53 = HyTechDevices; DKPN: P11.5KDBCT-ND; MANUFACTURER: Panasonic Electronic Components; MOPN: 667-ERA-3AEB1152V; MPN: ERA-3AEB1152V; POWER: 0.1W; RESISTANCE: 11.5k; TOLERANCE: 0.1%; VOLTAGE_CONTINUOUS: 33.91V; VOLTAGE_MAX: 75V
R57 R87 = HyTechDevices; DKPN: P20020CT-ND; MANUFACTURER: Panasonic Electronic Components; MOPN: 667-ERJ-PB3B2741V; MPN: ERJ-PB3B2741V; POWER: 0.2W; RESISTANCE: 2.74k; TOLERANCE: 0.1%; VOLTAGE_CONTINUOUS: 23.41V; VOLTAGE_MAX: 150V
R58 R67 R68 R75 R76 R88 = HyTechDevices; DKPN: P10.5KDBCT-ND; MANUFACTURER: Panasonic Electronic Components; MOPN: 677-ERA-3AEB1052V; MPN: ERA-3AEB1052V; POWER: 0.1W; RESISTANCE: 10.5k; TOLERANCE: 0.1%; VOLTAGE_CONTINUOUS: 32.40V; VOLTAGE_MAX: 75V
R59 R86 = HyTechDevices; DKPN: 311-100KHRTR-ND; MANUFACTURER: Yageo; MOPN: 603-RC0603FR-07100KL; MPN: RC0603FR-07100KL; POWER: 0.1W; RESISTANCE: 100k; TOLERANCE: 1%; VOLTAGE_CONTINUOUS: 75V; VOLTAGE_MAX: 75V
R65 R66 R72 R74 = HyTechDevices; DKPN: P13KBECT-ND; MANUFACTURER: Panasonic Electronic Components; MOPN: 667-ERA-3ARW133V; MPN: ERA-3ARW133V; POWER: 0.1W; RESISTANCE: 13k; TOLERANCE: 0.05%; VOLTAGE_CONTINUOUS: 75V; VOLTAGE_MAX: 150V
R70 = HyTechDevices; DKPN: 311-36.5KHRCT-ND; MANUFACTURER: Yageo; MOPN: 603-RC0603FR-0736K5L; MPN: RC0603FR-0736K5L; POWER: 0.1W; RESISTANCE: 36.5k; TOLERANCE: 1%; VOLTAGE_CONTINUOUS: 60.42V; VOLTAGE_MAX: 75V
R83 = HyTechDevices; DKPN: P20340TR-ND; MANUFACTURER: Panasonic Electronic Components; MOPN: 667-ERJ-PB3D3301V; MPN: ERJ-PB3D3301V; POWER: 0.2W; RESISTANCE: 3.3k; TOLERANCE: 0.5%; VOLTAGE_CONTINUOUS: 25.69V; VOLTAGE_MAX: 150
R105 = HyTechDevices; DKPN: 311-43.0KHRCT-ND; MANUFACTURER: Yageo; MOPN: 603-RC0603FR-0743KL; MPN: RC0603FR-0743KL; POWER: 0.1W; RESISTANCE: 43k; TOLERANCE: 1%; VOLTAGE_CONTINUOUS: 65.57V; VOLTAGE_MAX: 75V
R109 = HyTechDevices; DKPN: 311-18.7KHRCT-ND; MANUFACTURER: Yageo; MOPN: 603-RC0603FR-0718K7L; MPN: RC0603FR-0718K7L; POWER: 0.1W; RESISTANCE: 18.7k; TOLERANCE: 1%; VOLTAGE_CONTINUOUS: 43.24V; VOLTAGE_MAX: 75V
T1 = HyTechDevices; DKPN: 1840-1036-1-ND; MANUFACTURER: Pulse Electronics; MOPN: 673-HM2112ZNLT; MPN: HM2112ZNLT
TP1_24V = HyTechDevices; DKPN: 36-5015CT-ND; MANUFACTURER: Keystone Electronics; MOPN: 534-5015; MPN: 5015
TP_3.3V = HyTechDevices; DKPN: 36-5015CT-ND; MANUFACTURER: Keystone Electronics; MOPN: 534-5015; MPN: 5015; SIGNAL: +3V3
TP_5V = HyTechDevices; DKPN: 36-5015CT-ND; MANUFACTURER: Keystone Electronics; MOPN: 534-5015; MPN: 5015; SIGNAL: +5V
TP_12V = HyTechDevices; DKPN: 36-5015CT-ND; MANUFACTURER: Keystone Electronics; MOPN: 534-5015; MPN: 5015; SIGNAL: +12V
TP_GND = HyTechDevices; DKPN: 36-5015CT-ND; MANUFACTURER: Keystone Electronics; MOPN: 534-5015; MPN: 5015; SIGNAL: GND
TP_TSAL_GREEN = HyTechDevices - Copy; DKPN: 36-5015CT-ND; MANUFACTURER: Keystone Electronics; MOPN: 534-5015; MPN: 5015; SIGNAL: N$18
TP_TSAL_RED = HyTechDevices - Copy; DKPN: 36-5015CT-ND; MANUFACTURER: Keystone Electronics; MOPN: 534-5015; MPN: 5015; SIGNAL: N$19
TSAL_GREEN = HyTechDevices; COLOR: Green; DKPN: 754-1790-1-ND; MANUFACTURER: Kingbright; MOPN: 604-APT1608ZGCK; MPN: APT1608ZGCK
U1 U2 U8 = HyTechDevices; DKPN: 255-1436-5-ND; MANUFACTURER: Panasonic; MOPN: 769-AQY214EHA; MPN: AQY214EHA
U3 U9 U11 U13 U15 U17 U18 U20-U24 U28 = HyTechDevices; DKPN: 296-OPA991IDCKRCT-ND; MANUFACTURER: Texas Instruments; MOPN: 595-OPA991IDCKR; MPN: OPA991IDCKR
U4 U10 U19 U25 = HyTechDevices; DKPN: MAX7404CSA+-ND; MANUFACTURER: Maxim Integrated; MOPN: 700-MAX7404CSA; MPN: MAX7404CSA+
U5 = HyTechDevices - Copy; MANUFACTURER: Analog Devices; MPN: LTC6820IMS#PBF
U6 = HyTechDevices; DKPN: 296-26604-2-ND; MANUFACTURER: Texas Instruments; MOPN: 595-SN74LVC1G34DCKT; MPN: SN74LVC1G34DCKT
U7 = HyTechDevices; DKPN: ADM8316WBX30ARJZR7TR-ND; MANUFACTURER: Analog Devices Inc.; MOPN: 584-M8316WBX30ARJZR7; MPN: ADM8316WBX30ARJZR7; RESET_VOLTAGE: 3V; TIMEOUT: 102ms
U12 U14 U16 = HyTechDevices; DKPN: 296-SN74LVC1G08DCK3TR-ND; MANUFACTURER: Texas Instruments; MOPN: 595-SN74LVC1G08DCK3; MPN: SN74LVC1G08DCK3
U26 = HyTechDevices; DKPN: LMS8117AMP-3.3/NOPBCT-ND; MANUFACTURER: Texas Instruments; MOPN: 926-LMS8117AMP33NOPB; MPN: LMS8117AMP-3.3/NOPB
U27 U29 = HyTechDevices; DKPN: 296-49935-1-ND; MANUFACTURER: Texas Instruments; MOPN: 595-TCAN1051HGVDQ1; MPN: TCAN1051HGVDRQ1
U100 = HyTechDevices; DKPN: ADG1423BRMZ-REEL7CT-ND; MANUFACTURER: Analog Devices Inc.; MOPN: 584-ADG1423BRMZ; MPN: ADG1423BRMZ
U101 = HyTechDevices; DKPN: LM555CMX/NOPBCT-ND; MANUFACTURER: Texas Instruments; MOPN: 926-LM555CMX/NOPB; MPN: LM555CMX/NOPB
U$1-U$8 = HyTechManufacturing
WATCHDOG = HyTechDevices; COLOR: Blue; DKPN: 754-1789-1-ND; MANUFACTURER: Kingbright; MOPN: 604-APT1608VBC/D; MPN: APT1608VBC/D
XF1 = HyTechDevices; DKPN: 36-3568-ND; FUSE_TYPE: MINI 297; MANUFACTURER: Keystone; MOPN: 534-3568; MPN: 3568

## Nets
0.90X_DIV: R45.2 R46.2 R70.1 U13.3
0.525V_DIV: R38.2 R39.1 R40.2 U21.3
3.305V_DIV: R51.2 R53.1 R54.2 U17.3
4.66V_DIV_A: R41.2 R63.1 R64.1 U11.1
4.66V_DIV_B: R47.1 R48.2 R49.1 U15.1
24V_SCALED_3.3V: A2.D19 R84.1 R85.2
24VIN: D1.2 J5.1 XF1.1 XF1.2
60V_THRESHOLD: R37.2 U21.4 U100.6 U100.7
+3V3: 3.3V.2 A2.3.3V C2.1 C5.1 C6.2 C8.1 C9.1 C10.1 C20.1 C21.1 C29.1 C30.1 C34.2 C36.1 C42.2 C46.2 R32.2 R33.2 TP_3.3V.1 U3.5 U4.4 U4.7 U5.1 U5.6 U5.7 U5.8 U5.9 U5.12 U6.5 U7.5 U9.5 U10.4 U10.7 U18.5 U19.4 U19.7 U24.5 U25.4 U25.7 U26.2 U26.4 U27.5 U29.5
+5V: 5V.2 A1.3 A2.VIN C13.1 C14.1 C15.1 C16.1 C17.1 C18.1 C19.1 C26.1 C27.1 C28.1 C33.1 C37.1 C38.2 C39.2 C43.2 C44.2 J3.3 R39.2 R47.2 R49.2 R53.2 R63.2 R64.2 TP_5V.1 U8.4 U11.5 U12.5 U13.5 U14.5 U15.5 U16.5 U17.5 U21.5 U22.5 U23.5 U26.3 U27.3 U29.3
+12V: 12V.2 A3.3 C40.1 C101.1 C102.1 C104.1 R61.1 R62.1 R106.2 TP_12V.1 U100.1 U100.2 U100.5 U101.8
+24V: 24V.2 A1.1 A3.1 C7.1 C24.1 C35.1 C41.1 D6.2 J2.1 J3.5 J6.1 J100.5 K1.4 R7.2 R85.1 TP1_24V.1 U1.4 U2.4 U20.5 U28.5 XF1.3 XF1.4
ACCUMULATOR_GND: J2.7 J3.12
AIR2-: J3.11 Q2.3
AMS_OK: AMS_OK.2 J5.6 R12.2 TP_AMS_OK.1 U2.3
AMS_OK_3.3V: D2.3 R13.1 R14.1 U6.4
BSPD_CURRENT: BSPD_CURRENT.1 D7.2 J5.10 R58.2 R79.1 U20.4
BSPD_CURRENT_REF: J5.11 R88.2 U28.4
BSPD_CURRENT_TEENSY: A2.D14 R79.2 R80.1
CANH: J4.1 J5.9 U27.7
CANH/1.3B: J4.2 R36.2
CANL: J5.8 R60.2 U27.6
CHASSIS_GND: J2.6 J5.13
CS_LTC_6820: A2.D10 U5.5
CURRENT: CURRENT_SENSE.1 J3.6 R30.1 R59.2 U20.1
CURRENT_BUFFER: U9.3 U9.4 U10.2
CURRENT_FILTERED: A2.D21 U10.5
CURRENT_REF: CURRENT_REF.1 J3.7 R22.1 R86.2 U28.1
CURRENT_REF_BUFFER: U3.3 U3.4 U4.2
CURRENT_REF_FILTERED: A2.D20 U4.5
EM_CANH: J6.2 J8.1 U29.7
EM_CANL: J6.3 R89.2 U29.6
EM_CRX: A2.D23 U29.4
EM_CTX: A2.D22 U29.1
GND: A1.2 A2.AGND/GND A2.GND A3.2 C1.2 C2.2 C3.2 C4.2 C5.2 C6.1 C7.2 C8.2 C9.2 C10.2 C11.2 C12.2 C13.2 C14.2 C15.2 C16.2 C17.2 C18.2 C19.2 C20.2 C21.2 C22.2 C23.2 C24.2 C25.1 C26.2 C27.2 C28.2 C29.2 C30.2 C31.2 C32.2 C33.2 C34.1 C35.2 C36.2 C37.2 C38.1 C39.1 C40.2 C41.2 C42.1 C43.1 C44.1 C45.1 C46.1 C100.2 C101.2 C102.2 C103.2 C104.2 D1.1 D2.1 D3.1 D4.1 D5.1 D6.1 D7.1 D11.1 D100.1 D101.1 J2.4 J3.2 J3.4 J3.9 J5.12 J6.4 J100.8 K1.2 PRECHARGE_OK.1 Q1.2 Q2.2 Q100.2 Q101.2 R2.1 R3.1 R4.2 R6.1 R9.1 R10.1 R11.1 R12.1 R14.2 R15.1 R17.2 R19.1 R21.2 R23.2 R24.2 R26.1 R27.1 R29.1 R31.2 R37.1 R38.1 R40.1 R41.1 R42.1 R43.1 R44.1 R45.1 R46.1 R48.1 R50.1 R51.1 R52.1 R54.1 R56.2 R57.1 R59.1 R65.2 R69.1 R71.1 R72.2 R73.1 R78.2 R80.2 R81.1 R82.1 R83.1 R84.2 R86.1 R87.1 R90.1 R100.1 R101.2 R102.2 R110.2 TEENSY_OK.1 TP_GND.1 U1.2 U3.2 U4.3 U5.13 U5.14 U6.3 U7.2 U8.2 U9.2 U10.3 U11.2 U12.3 U13.2 U14.3 U15.2 U16.3 U17.2 U18.2 U19.3 U20.2 U21.2 U22.2 U23.2 U24.2 U25.3 U26.1 U27.2 U27.8 U28.2 U29.2 U29.8 U100.4 U100.8 U101.1 WATCHDOG.1
HV+_OUT_OK: R43.2 U12.4 U14.1
IM: T1.10 U5.10
IMD_OK: D5.2 IMD_OK.2 J5.7 R5.1 R6.2 TP_IMD_OK.1 U1.3
IMD_OK_TEENSY: A2.D16 R4.1 R5.2
INVERTER_24V: J3.1 K1.3
INVERTER_EN: J5.2 R92.1
IP: T1.12 U5.11
ISO_PACK+: J100.1 R75.1
ISO_PACK-: J100.2 R73.2 R76.1
ISO_TS+: J100.3 R67.1
ISO_TS-: J100.4 R68.1 R81.2
MHS: D3.2 J2.3 R15.2 R20.1
MHS_TEENSY: A2.D7 R20.2 R21.1
N$1: 3.3V.1 R19.2
N$2: 5V.1 R10.2
N$3: C103.1 R105.1 U101.2 U101.6
N$4: PRECHARGE_OK.2 R16.1
N$5: C100.1 U101.5
N$6: R105.2 R106.1 U101.7
N$7: Q2.1 R18.2
N$8: R8.2 U1.1
N$9: OKHS.1 R9.2
N$10: R65.1 R67.2 U22.1
N$11: R66.1 R68.2 U22.3
N$12: R57.2 R58.1 U20.3
N$13: A2.D11 R33.1 U5.2
N$14: 12V.1 R11.2
N$15: R82.2 U6.2 U7.1
N$16: R7.1 U2.1
N$17: AMS_OK.1 R3.2
N$18: D100.3 R102.1 R104.1 TP_TSAL_GREEN.1 U100.9
N$19: D101.3 R101.1 R103.1 TP_TSAL_RED.1 U101.3
N$20: Q1.3 U2.2
N$21: C25.2 R36.1 R60.1
N$22: R72.1 R75.2 U23.1
N$23: R74.1 R76.2 U23.3
N$24: R62.2 TSAL_GREEN.2
N$25: A2.D0 A2.D4 U27.4
N$26: C31.1 U25.1 U25.6
N$27: IMD_OK.1 R2.2
N$28: F2.1 J5.3
N$29: A2.D1 A2.D3 U27.1
N$30: Q1.1 R13.2
N$31: F1.1 J5.4
N$32: 24V.1 R83.2
N$33: R87.2 R88.1 U28.3
N$34: C45.2 R89.1 R91.1
N$35: J8.2 R91.2
N$36: R25.1 U5.16
N$37: R24.1 R25.2 U5.15
N$38: K1.1 R92.2
N$39: C1.1 T1.11
N$40: J3.10
N$41: R28.1 U14.4
N$43: A2.D12 R32.1 U5.3
N$44: A2.D13 U5.4
N$45: C32.1 U25.8
N$46: R61.2 TSAL_RED.2
N$47: R34.1 WATCHDOG.2
N$48: R77.2 R78.1 U24.1
N$49: R28.2 U8.1
N$50: C11.1 U10.1 U10.6
N$51: C12.1 U10.8
N$52: R30.2 R31.1 U9.1
N$53: C3.1 U4.1 U4.6
N$54: C4.1 U4.8
N$55: R22.2 R23.1 U3.1
N$56: C22.1 U19.1 U19.6
N$57: C23.1 U19.8
N$58: R55.2 R56.1 U18.1
N$59: R35.1 TEENSY_OK.2
N$60: Q100.1 R103.2
N$61: Q101.1 R104.2
OKHS: J2.2 OKHS.2 R8.1 R90.2
PACK+_BUFFER: U18.3 U18.4 U19.2
PACK+_FILTERED: A2.D17 U19.5
PACK+_OUT: PACK+_OUT_TEST.1 R55.1 R70.2 R71.2 R74.2 U15.3 U17.1 U23.4
PRECHARGE+_OUT_OK: R29.2 U14.2 U16.4
PRECHARGE_OK: D4.3 D11.3 J100.7 PRECHARGE_OK_TEST.1 R16.2 R17.1 R18.1 R109.1 U8.3
PRECHARGE_OK_TEENSY: A2.D15 R109.2 R110.1
PRECHARGE_REACHED: R44.2 U12.2 U13.4
SHDN: J3.8 J5.5 J100.6
TD+: J1.1 R1.2 T1.1 TD+.1
TD-: J1.2 R1.1 T1.3 TD-.1
TEENSY_OK: A2.D6 R27.2 R35.2 U7.3
TIMER_EN: R100.2 U100.10 U101.4
TS+_OUT: R66.2 R69.2 R77.1 TS+_OUT_TEST.1 U11.3 U13.1 U21.1 U22.4
TS+_OUT_BUFFER: U24.3 U24.4 U25.2
TS+_OUT_FILTERED: A2.D18 U25.5
TS+_OUT_OV_OK: R42.2 U11.4 U12.1
TSAL_GREEN: F2.2 Q101.3 TSAL_GREEN.1
TSAL_RED: F1.2 Q100.3 TSAL_RED.1
V_PACK_REF_OV_OK: R50.2 U15.4 U16.1
V_PACK_REF_UV_OK: R52.2 U16.2 U17.4
WATCHDOG_INPUT: A2.D5 R26.2 R34.2 U7.4 WATCHDOG_INPUT.1

## Tracks (layer width: path | path; a pad name or v marks a point on that pad's centre or on a via)
0.90X_DIV  (3 unrouted)
0.525V_DIV  (3 unrouted)
3.305V_DIV  (3 unrouted)
4.66V_DIV_A  (3 unrouted)
4.66V_DIV_B  (3 unrouted)
24V_SCALED_3.3V  (2 unrouted)
24VIN  (3 unrouted)
60V_THRESHOLD  (3 unrouted)
+3V3  (42 unrouted)
+5V  (40 unrouted)
+12V  (13 unrouted)
+24V  (21 unrouted)
ACCUMULATOR_GND  (1 unrouted)
AIR2-  (1 unrouted)
AMS_OK  (4 unrouted)
AMS_OK_3.3V  (3 unrouted)
BSPD_CURRENT  (5 unrouted)
BSPD_CURRENT_REF  (2 unrouted)
BSPD_CURRENT_TEENSY  (2 unrouted)
CANH  (2 unrouted)
CANH/1.3B  (1 unrouted)
CANL  (2 unrouted)
CHASSIS_GND  (1 unrouted)
CS_LTC_6820  (1 unrouted)
CURRENT  (4 unrouted)
CURRENT_BUFFER  (2 unrouted)
CURRENT_FILTERED  (1 unrouted)
CURRENT_REF  (4 unrouted)
CURRENT_REF_BUFFER  (2 unrouted)
CURRENT_REF_FILTERED  (1 unrouted)
EM_CANH  (2 unrouted)
EM_CANL  (2 unrouted)
EM_CRX  (1 unrouted)
EM_CTX  (1 unrouted)
GND  (168 unrouted)
HV+_OUT_OK  (2 unrouted)
IM  (1 unrouted)
IMD_OK  (6 unrouted)
IMD_OK_TEENSY  (2 unrouted)
INVERTER_24V  (1 unrouted)
INVERTER_EN  (1 unrouted)
IP  (1 unrouted)
ISO_PACK+  (1 unrouted)
ISO_PACK-  (2 unrouted)
ISO_TS+  (1 unrouted)
ISO_TS-  (2 unrouted)
MHS  (3 unrouted)
MHS_TEENSY  (2 unrouted)
N$1  (1 unrouted)
N$2  (1 unrouted)
N$3  (3 unrouted)
N$4  (1 unrouted)
N$5  (1 unrouted)
N$6  (2 unrouted)
N$7  (1 unrouted)
N$8  (1 unrouted)
N$9  (1 unrouted)
N$10  (2 unrouted)
N$11  (2 unrouted)
N$12  (2 unrouted)
N$13  (2 unrouted)
N$14  (1 unrouted)
N$15  (2 unrouted)
N$16  (1 unrouted)
N$17  (1 unrouted)
N$18  (4 unrouted)
N$19  (4 unrouted)
N$20  (1 unrouted)
N$21  (2 unrouted)
N$22  (2 unrouted)
N$23  (2 unrouted)
N$24  (1 unrouted)
N$25  (2 unrouted)
N$26  (2 unrouted)
N$27  (1 unrouted)
N$28  (1 unrouted)
N$29  (2 unrouted)
N$30  (1 unrouted)
N$31  (1 unrouted)
N$32  (1 unrouted)
N$33  (2 unrouted)
N$34  (2 unrouted)
N$35  (1 unrouted)
N$36  (1 unrouted)
N$37  (2 unrouted)
N$38  (1 unrouted)
N$39  (1 unrouted)
N$41  (1 unrouted)
N$43  (2 unrouted)
N$44  (1 unrouted)
N$45  (1 unrouted)
N$46  (1 unrouted)
N$47  (1 unrouted)
N$48  (2 unrouted)
N$49  (1 unrouted)
N$50  (2 unrouted)
N$51  (1 unrouted)
N$52  (2 unrouted)
N$53  (2 unrouted)
N$54  (1 unrouted)
N$55  (2 unrouted)
N$56  (2 unrouted)
N$57  (1 unrouted)
N$58  (2 unrouted)
N$59  (1 unrouted)
N$60  (1 unrouted)
N$61  (1 unrouted)
OKHS  (3 unrouted)
PACK+_BUFFER  (2 unrouted)
PACK+_FILTERED  (1 unrouted)
PACK+_OUT  (7 unrouted)
PRECHARGE+_OUT_OK  (2 unrouted)
PRECHARGE_OK  (8 unrouted)
PRECHARGE_OK_TEENSY  (2 unrouted)
PRECHARGE_REACHED  (2 unrouted)
SHDN  (2 unrouted)
TD+  (3 unrouted)
TD-  (3 unrouted)
TEENSY_OK  (3 unrouted)
TIMER_EN  (2 unrouted)
TS+_OUT  (7 unrouted)
TS+_OUT_BUFFER  (2 unrouted)
TS+_OUT_FILTERED  (1 unrouted)
TS+_OUT_OV_OK  (2 unrouted)
TSAL_GREEN  (2 unrouted)
TSAL_RED  (2 unrouted)
V_PACK_REF_OV_OK  (2 unrouted)
V_PACK_REF_UV_OK  (2 unrouted)
WATCHDOG_INPUT  (4 unrouted)